# Altium PCB PCB2.PcbDoc
Units mil, origin at the board's own origin, x right, y up, seen from the top; angles counter-clockwise.
Board outline 1800 x 675 mil, 2 copper layers (Top Layer, Bottom Layer); 14 components, 7 nets, 44 pads, 1 vias.
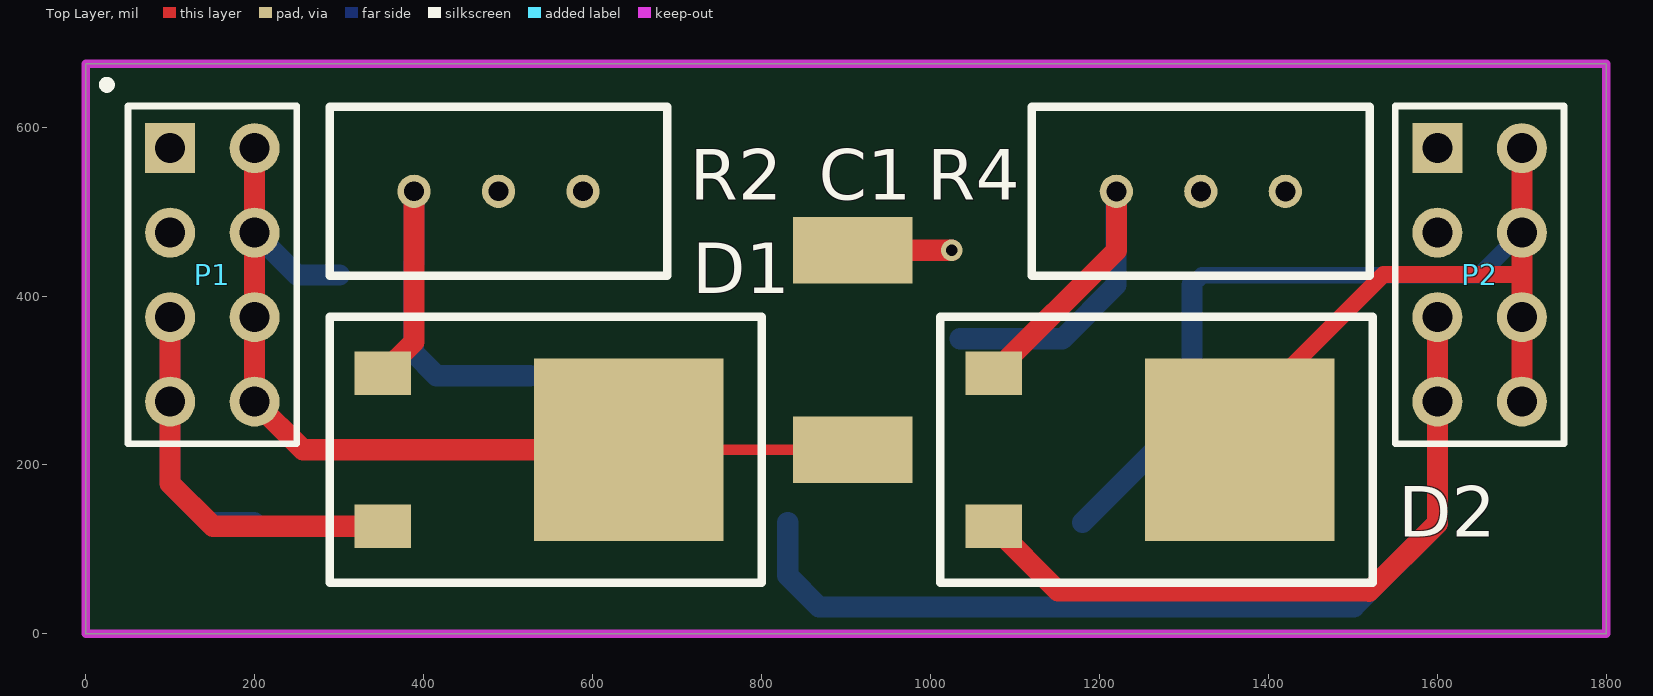
[diagram p0: Top Layer view]
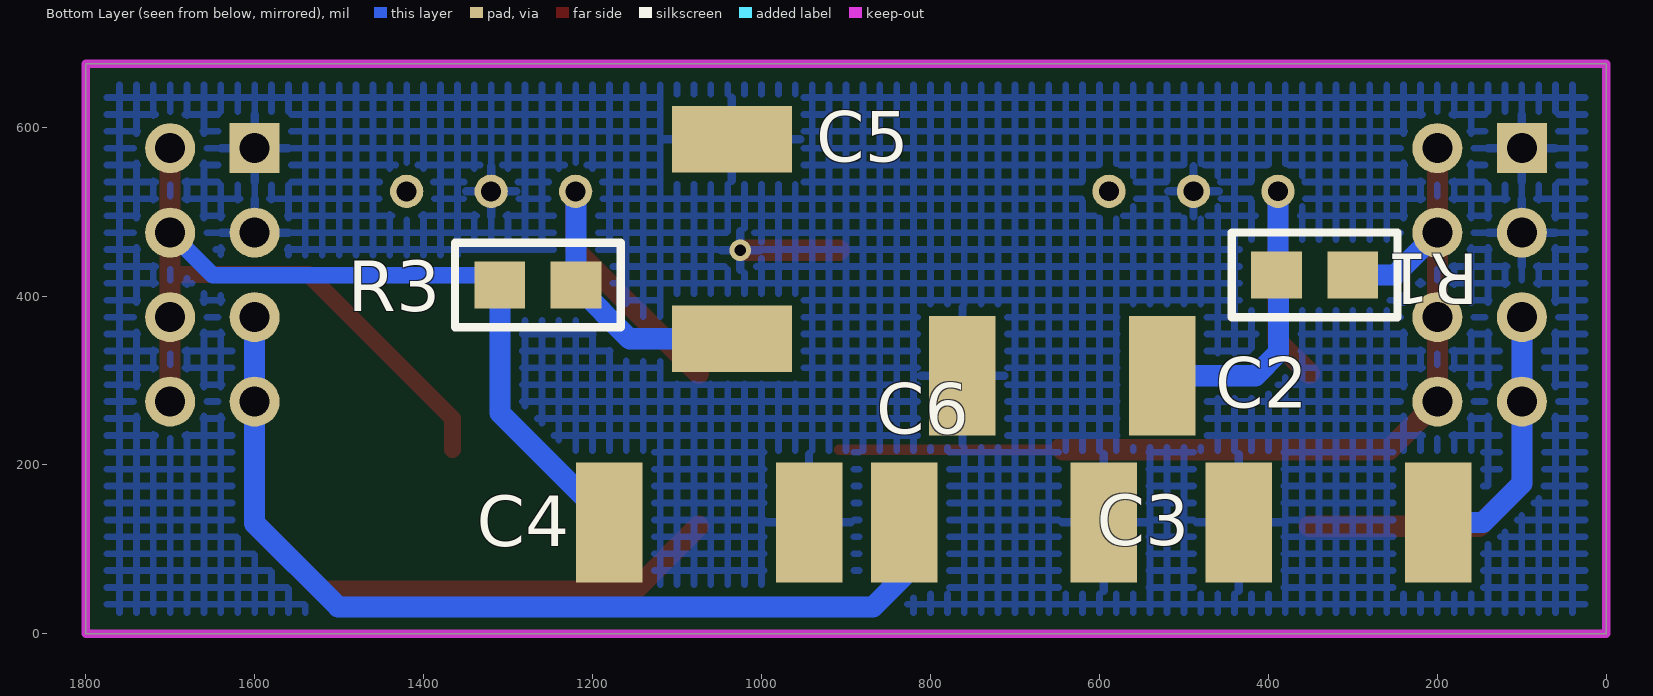
[diagram p1: Bottom Layer view, seen from below]

## Layer stack, top to bottom
Top Solder: solder mask 0.4, Solder Resist, Dk 3.5
Top Layer: signal copper 1.4
Dielectric 1: dielectric 12.6, FR-4, Dk 4.8
Bottom Layer: signal copper 1.4
Bottom Solder: solder mask 0.4, Solder Resist, Dk 3.5

## Board outline
0,0 1800,0 1800,675 0,675

## Design rules (kind name [scope] priority, off if disabled: settings)
Clearance [All] p1: gap=10
PolygonConnect [All] p1: connectstyle=Relief reliefconductorwidth=10 reliefentries=4 polygonreliefangle="90 Angle" airgapwidth=10
RoutingVias [All] p1: holewidth=28 width=50 viastyle="Through Hole" minholewidth=28 minwidth=50 maxholewidth=28 maxwidth=50
SolderMaskExpansion [All] p1: expansion=4
Width [All] p1: maxlimit=88.74 minlimit=10 preferedwidth=10
29 further rules are at their usual default settings.

## Components (designator, comment, footprint, x,y, rotation, side; value= is the part's Value field where it differs from the comment)
C1 "100,0" Cap_BIG 833,175 r0 top
C2 "10,0" Cap_BIG 482.89,230.62 r90 bottom
C3 "10,0" Cap_BIG 156,57 r90 bottom
C4 "100,0" Cap_BIG 1223,207 r270 bottom
C5 "10,0" Cap_BIG 1110,306.35 r180 bottom
C6 "10,0" Cap_BIG 874,207 r270 bottom
D1 "LM1117-ADJ" LM1117 643,218 r270 top
D2 "LM1117-ADJ" LM1117 1366,218 r270 top
P1 "Header 4X2" HDR2X4 100,575 r270 top
P2 "Header 4X2" HDR2X4 1600,575 r270 top
R1 "121" RES 443,474 r270 bottom
R2 "3296" PODSTR_RES_3296 588.67,524 r180 top
R3 "121" RES 1167,364 r90 bottom
R4 "3296" PODSTR_RES_3296 1420,523.94 r180 top

## Footprints (in the part's own frame and the unit in brackets; to place one, negate y for a bottom-side part, rotate by r counter-clockwise, add the part's x,y. Pads: shape width x height; smd on the part's side, far side on the other; paste and mask are expansions set on the pad)
Cap_BIG [mm] "FROM_MAX"
  rect 3.6x2 smd: 1(1.905,7.092) 2(1.905,1.092)
  body extent 0,-0.01 3.81,8.19, height 2.54
HDR2X4 [mm] "Connector; Header; 4x2 Position"
  rect 1.5x1.5 hole 0.9: 1(0,0)
  round 1.5 hole 0.9: 2(0,2.54) 3(2.54,0) 4(2.54,2.54) 5(5.08,0) 6(5.08,2.54) 7(7.62,0) 8(7.62,2.54)
  silkscreen extent -1.27,-1.27 8.89,3.81
LM1117 [mm]
  rect 1.3x1.7 smd: 1(-2.3,-7.4) 3(2.3,-7.4)
  rect 5.5x5.7 smd: 2(0,0)
  silkscreen extent -4,-9 4,4
PODSTR_RES_3296 [mm]
  round 1 hole 0.6: 1(0,0) 2(2.54,0) 3(5.08,0)
  silkscreen extent -2.54,-2.54 7.62,2.54
RES [mil] "FROM_MAX"
  rect 55.98x60 smd: 1(49,52.71) 2(49,142.71)
  silkscreen extent -1,0 99,196, body extent 17,19 81,177, height 100

## Part data
C1 C2 C3 C4 C5 C6: library part CAP_BIG
P1 P2: "Header, 4-Pin, Dual row"
R1 R3: library part RES
R2 R4: library part PODSTR_RES_NEW

## Via types
v1: diameter 25.59, hole 13.78, Top Layer to Bottom Layer, 1 vias

## Nets (pads, with @x,y where several pads share a name; then routed paths per layer and width w, separated by ;. In a path a pad name is that pad's centre, name@x,y a point inside that pad or via, vN(x,y) a via of type N, cw(c..) or ccw(c..) an arc to the next point about the centre after c; other vN are vias at no path point)
GND: C1.1 C2.1 C3.1 C4.1 C5.1 C6.1 P1.1 P1.3 P2.1 P2.3 R2.2 R4.2 | length 117.1
  Top Layer w25: C1.1 1024.78,454.22 v1(1025,454)
IN1: C3.2 D1.3 P1.5 P1.7 | length 784.7
  Top Layer w25: P1.5 P1.7 100,178 150.55,127.45 D1.3
  Bottom Layer w25: P1.5 P1.7 100,178 146,132 C3.2
IN2: C6.2 D2.3 P2.5 P2.7 | length 1967.3
  Top Layer w25: D2.3 1151.11,51 1518,51 1519,50 1600,131 P2.7 P2.5
  Bottom Layer w25: C6.2 831,69 868,32 1501,32 1600,131 P2.7 P2.5
NetC2_2: C2.2 D1.1 R1.1 R2.3 | length 571.3
  Top Layer w25: D1.1 388.67,345.56 R2.3
  Bottom Layer w25: R2.3 R2.3 388.71,439 388,438.29 388,333 415.39,305.61 C2.2
NetC5_2: C5.2 D2.1 R3.1 R4.3 | length 597.7
  Top Layer w25: D2.1 1220,453.89 R4.3
  Bottom Layer w25: C5.2 1156.06,349.35 R3.1 1219.71,523.65 R4.3
OUT1: C1.2 D1.2 P1.2 P1.4 P1.6 P1.8 R1.2 | length 1162.5
  Top Layer w12: D1.2@650,225 D1.2 C1.2
  Top Layer w25: P1.2 P1.4 P1.6 P1.8 257,218 D1.2
  Bottom Layer w25: P1.4 250,425 R1.2
OUT2: C4.2 D2.2 P2.2 P2.4 P2.6 P2.8 R3.2 | length 1493.4
  Top Layer w20: D2.2 1366,255 1536.47,425.47 1697.47,425.47 1700,428
  Top Layer w25: P2.8 P2.6 1700,428 P2.4 P2.2
  Bottom Layer w20: R3.2 1321.24,424.53 1649.53,424.53 P2.4
  Bottom Layer w25: C4.2 1309.71,261.71 R3.2
pads on no net: R2.1 R4.1

## Polygon pours and split planes (outlines as drawn)
GND on Bottom Layer "Top Layer-No Net" (hatched 90Degree grid 20 track 8, remove dead copper, pour order 3): 25,650 25,25 1775,25 1775,650

## Keep-outs
Keep-Out Layer:
  the board outline again, w10

## Silkscreen, mask and mechanical layers (free items; w line width, h text height)
Top Overlay:
  circle w10: c25,650 r4.47